# Altium PCB HANDS_FREE_MotorDrive_V2.PcbDoc
Units mil, origin at the board's own origin, x right, y up, seen from the top; angles counter-clockwise.
Board outline 1400 x 1900 mil, 2 copper layers (Top Layer, Bottom Layer); 45 components, 30 nets, 139 pads, 89 vias.
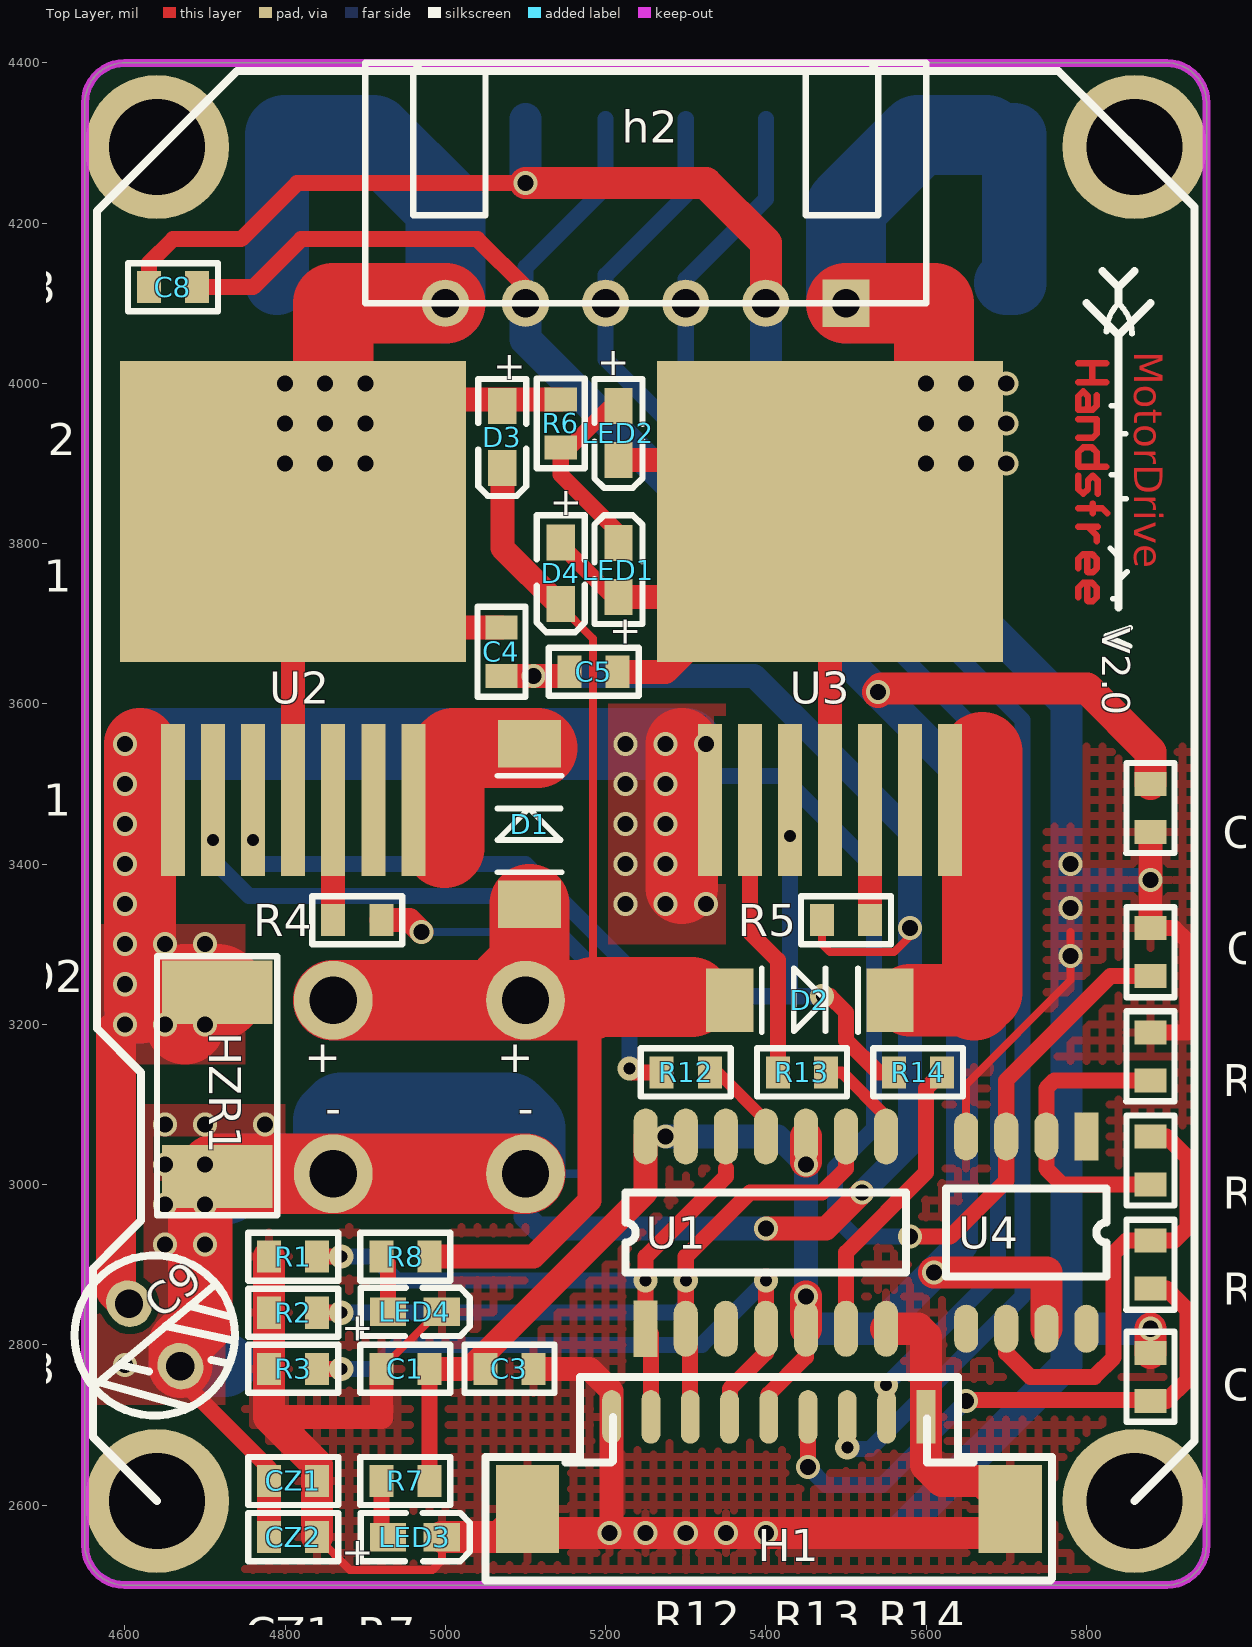
[diagram p0: Top Layer view]
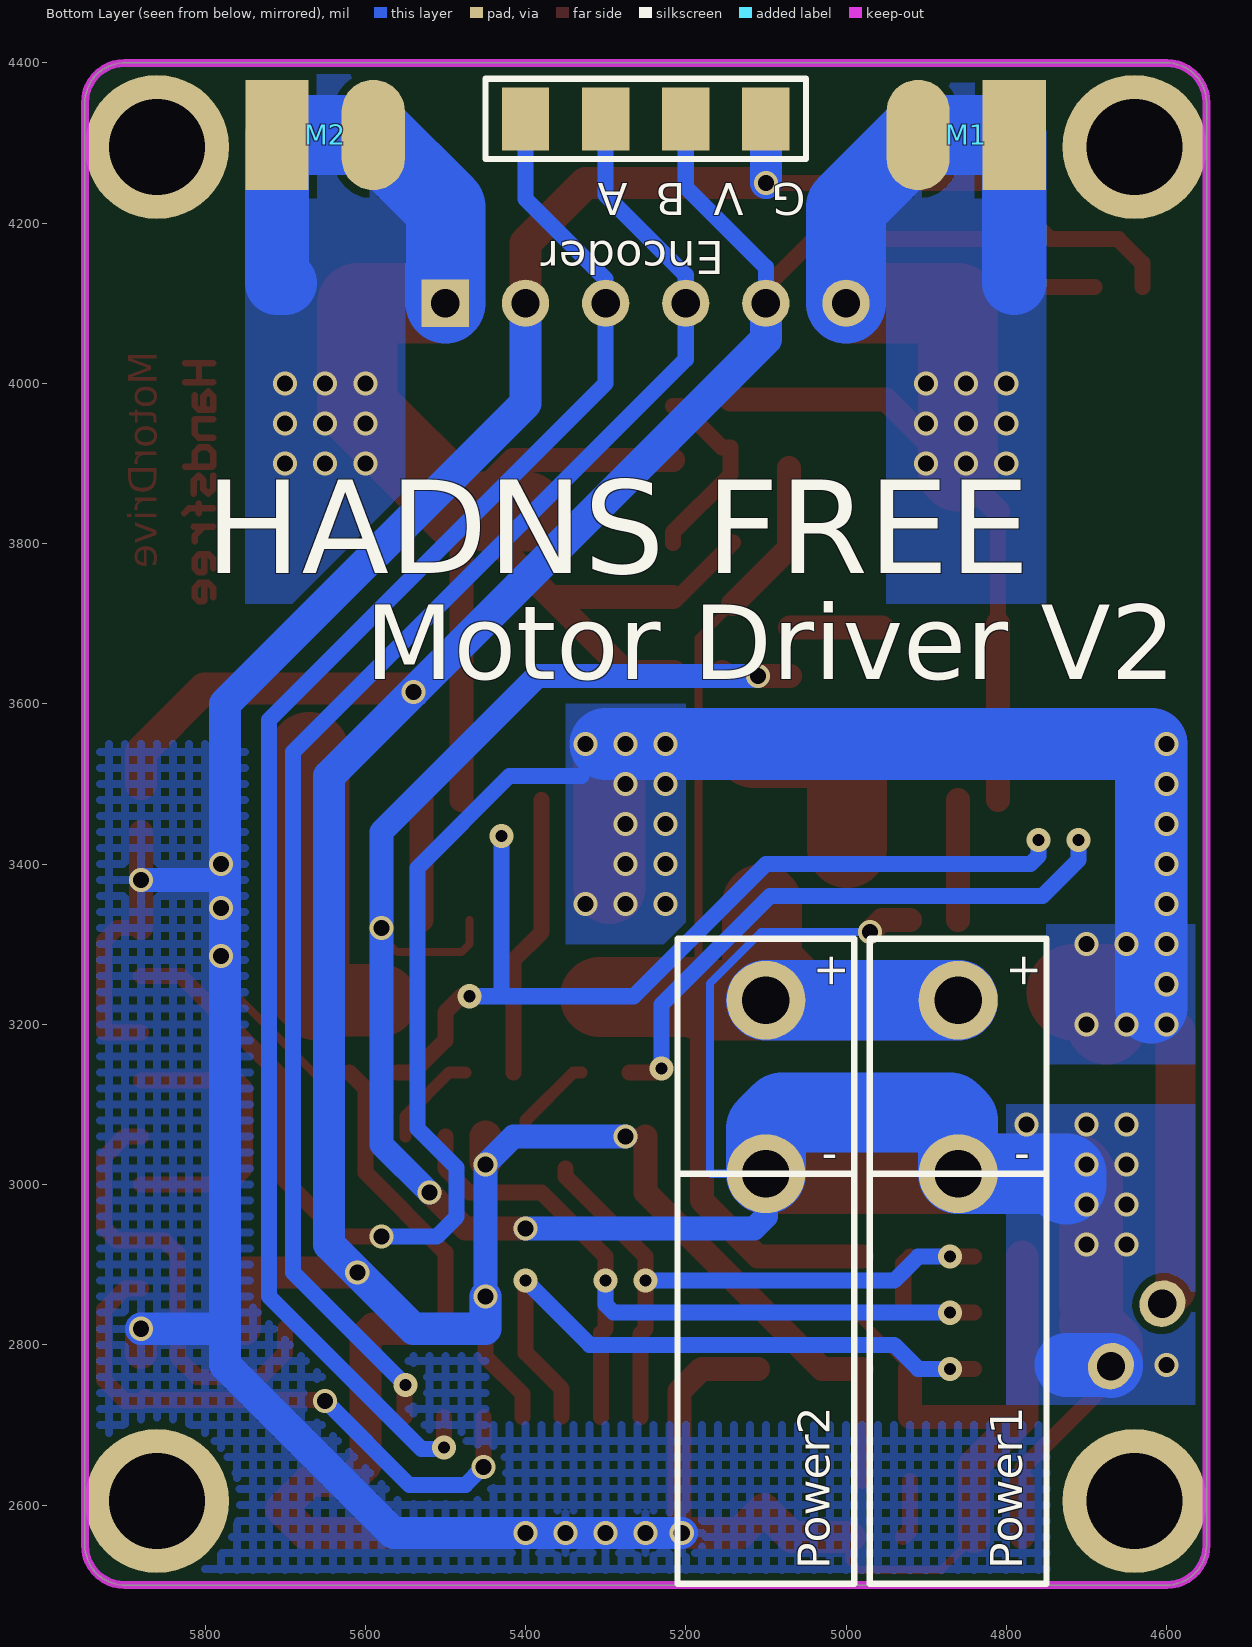
[diagram p1: Bottom Layer view, seen from below]

## Layer stack, top to bottom
Top Layer: signal copper 1.4
Dielectric: dielectric 12.6, FR-4, Dk 4.8
Bottom Layer: signal copper 1.4

## Board outline
4550,2550 4550,4350 cw(c4600,4350) 4600,4400 5900,4400 cw(c5900,4350) 5950,4350 5950,2550 cw(c5900,2550) 5900,2500 4600,2500 cw(c4600,2550)

## Design rules (kind name [scope] priority, off if disabled: settings)
Clearance [All] p1: gap=9
ComponentClearance [All] p1 off: gap=10 collisioncheckmode=3 verticalgap=10 showdistances=FALSE
Height [All] p1 off: minheight=0 maxheight=1000 prefheight=500
HoleSize [All] p1: absolutevalues=TRUE maxlimit=200 minlimit=1 maxpercent=80.000 minpercent=20.000
HoleToHoleClearance [All] p1: gap=6 allowstackedmicrovias=TRUE
MinimumSolderMaskSliver [All] p1: minsoldermaskwidth=0
PolygonConnect [All] p1: connectstyle=Relief reliefconductorwidth=10 reliefentries=4 polygonreliefangle="90 Angle"
RoutingVias [All] p1: holewidth=28 width=50 viastyle="Through Hole" minholewidth=10 minwidth=20 maxholewidth=50 maxwidth=50
SilkToSilkClearance [All] p1: silktosilkclearance=0
SilkscreenOverComponentPads SilkToSolderMaskClearance [IsPad] p1: minsilkscreentomaskgap=0
SolderMaskExpansion [All] p1: expansion=4
Width [All] p1: maxlimit=200 minlimit=7 preferedwidth=7
21 further rules are at their usual default settings.

## Components (designator, comment, footprint, x,y, rotation, side; value= is the part's Value field where it differs from the comment)
C1 "10uf" ELE_0603_P 4950,2770 r180 top
C2 "10uf" ELE_0603_P 5880,3470 r270 top
C3 "10uf" ELE_0603_P 5080,2770 r0 top
C4 "20nf" ELE_0603_P 5070,3665 r270 top
C5 "20nf" ELE_0603_P 5185,3640 r0 top
C6 "1uf" ELE_0603_P 5880,2760 r90 top
C7 "20nf" ELE_0603_P 5880,3290 r90 top
C8 "10uf" ELE_0603_P 4660,4120 r180 top
C9 "47uf" ELE_CAP_DV_5*X 4605,2850 r310 top
CZ1 "0R" ELE_0603_P 4810,2630 r0 top
CZ2 "0R" ELE_0603_P 4810,2560 r0 top
D1 "SS54" ELE_D1206 5205,3350 r90 top
D2 "SS54" ELE_D1206 5355,3130 r0 top
D3 "1N5819" ELE_SOD-323 5070,3970 r270 top
D4 "1N5819" ELE_SOD-323 5143,3800 r270 top
"G  V  B  A" "HDR_Header_1*4" HDR_Header_2.54_PH_1*4 5100,4330 r0 bottom (schematic designator "ENCORD GVBA")
H1 "Motor Io header" HDR_Molex_PH_1.25_9P 5600,2710 r180 top
h2 "HANDS_FREE_MOTOR_XH2.54_6P" HDR_Header_XH2.54_DH_1*6 5500,4100 r180 top
HZR1 "0.05R" ELE_2512_P 4715,3245 r270 top
LED1 "ELE_LED" ELE_0603极性_P 5212,3745 r90 top
LED2 "ELE_LED" ELE_0603极性_P 5220,3960 r270 top
LED3 "ELE_LED" ELE_0603极性_P 4940,2563.98 r0 top
LED4 "ELE_LED" ELE_0603极性_P 4940,2845 r0 top
M1 "HDR_Header_1*2" HDR_H_PH_2P 4790,4310 r270 bottom
M2 "HDR_Header_1*2" HDR_H_PH_2P 5710,4310 r90 bottom
Power1 "HDR_Header_Power_2P" HDR_MOLEX_POWER5557_DH_2P 4860,3230 r270 bottom
Power2 "HDR_Header_Power_2P" HDR_MOLEX_POWER5557_DH_2P 5100,3230 r270 bottom
R1 "10k" ELE_0603_P 4810,2910 r180 top
R2 "10k" ELE_0603_P 4810,2840 r180 top
R3 "10k" ELE_0603_P 4810,2770 r180 top
R4 "4.7k" ELE_0603_P 4890,3330 r180 top
R5 "4.7k" ELE_0603_P 5500,3330 r0 top
R6 "10k" ELE_0603_P 5143.98,3950 r90 top
R7 "10k" ELE_0603_P 4950,2630 r0 top
R8 "10k" ELE_0603_P 4950,2910 r0 top
R9 "1k" ELE_0603_P 5880,3160 r270 top
R10 "6.8k" ELE_0603_P 5880,3030 r90 top
R11 "1k" ELE_0603_P 5880,2900 r270 top
R12 "39R" ELE_0603_P 5300,3140 r180 top
R13 "39R" ELE_0603_P 5445,3140 r180 top
R14 "39R" ELE_0603_P 5590,3140 r0 top
U1 "CHP_74HC08D" CHP_SOP_14P 5250,2820 r90 top
U2 "CHP_BTS7970" CHP_BTS7970_P-TO-263_7#1 4660,3480 r0 top
U3 "CHP_BTS7970" CHP_BTS7970_P-TO-263_7#2 5330,3480 r0 top
U4 "CHP_OP07" CHP_SOP_8P 5800,3060 r270 top

## Footprints (in the part's own frame and the unit in brackets; to place one, negate y for a bottom-side part, rotate by r counter-clockwise, add the part's x,y. Pads: shape width x height; smd on the part's side, far side on the other; paste and mask are expansions set on the pad)
CHP_BTS7970_P-TO-263_7#1 [mil]
  rect 30x190 smd: 1(0,0) 2(50,0) 3(100,0) 4(150,0) 5(200,0) 6(250,0) 7(300,0)
  rect 432x376 smd: 8(150,360)
  Top Layer lines w40: -20,-80 -20,0 -20,51 -20,55 -20,69 -20,70 -20,80
CHP_BTS7970_P-TO-263_7#2 [mil]
  rect 30x190 smd: 1(0,0) 2(50,0) 3(100,0) 4(150,0) 5(200,0) 6(250,0) 7(300,0)
  rect 432x376 smd: 8(150,360)
CHP_SOP_8P [mil]
  rect 60x30 smd: 1(0,0)
  oval 60x30 smd: 2(0,-50) 3(0,-100) 4(0,-150) 5(240,-150) 6(240,-100) 7(240,-50) 8(240,0)
  silkscreen extent 65,-175 175,25
CHP_SOP_14P [mil]
  rect 70x30 smd: 1(0,0)
  oval 70x30 smd: 2(0,-50) 3(0,-100) 4(0,-150) 5(0,-200) 6(0,-250) 7(0,-300) 8(240,-300) 9(240,-250) 10(240,-200) 11(240,-150) 12(240,-100) 13(240,-50) 14(240,0)
  silkscreen extent 70,-325 170,25
ELE_0603_P [mil]
  rect 30x40 smd: 1(-30,0) 2(30,0)
  silkscreen extent -56,-30 56,30
ELE_0603极性_P [mil]
  rect 45x35.43 smd: 1(-11.46,-4) 2(55.46,-4)
  silkscreen extent -45,-34 91,26
ELE_2512_P [mm]
  rect 2x3.5 smd: 1(0.127,0) 2(5.969,0)
  silkscreen extent -1.02,-1.91 7.2,1.91
ELE_CAP_DV_5*X [mil]
  oval 59x55 hole 35.4: 1(-1,1) 2(100,0)
  silkscreen extent -50,-100 150,100
ELE_D1206 [mm]
  rect 1.5x2 smd: 1(0,2.54) 2(5.08,2.54)
  silkscreen extent 1.02,1.52 4.06,3.56
ELE_SOD-323 [mil]
  rect 45x35.43 smd: 1(-1.46,1) 2(75.46,1)
  silkscreen extent -35,-29 111,31
HDR_H_PH_2P [mm]
  rect 3.5x2 smd: 1(0,0)
  oval 3.5x2 smd: 2(0,-3.048)
HDR_Header_2.54_PH_1*4 [mm] "Connector; Header; 4 Position"
  rect 1.5x2 smd: 1(0,0) 2(2.54,0) 3(5.08,0) 4(7.62,0)
  silkscreen extent -1.27,-1.27 8.89,1.27
HDR_Header_XH2.54_DH_1*6 [mm] "Connector; Header; 2 Position; Right"
  rect 1.5x1.5 hole 0.9: 1(0,0)
  round 1.5 hole 0.9: 2(2.54,0) 3(5.08,0) 4(7.62,0) 5(10.16,0) 6(12.7,0)
  silkscreen extent -2.54,-7.62 15.24,0
HDR_Molex_PH_1.25_9P [mm]
  rect 0.6x1.7 smd: 1(0,0)
  oval 0.6x1.7 smd: 2(1.25,0) 3(2.5,0) 4(3.745,0) 5(4.989,0) 6(6.234,0) 7(7.478,0) 8(8.723,0) 9(9.968,0)
  rect 2x2.8 smd: 10(-2.667,2.921) 11(12.635,2.921)
  silkscreen extent -3.99,-1.27 13.97,5.18
HDR_MOLEX_POWER5557_DH_2P [mm]
  round 2.5 hole 1.5: 1(0,0) 2(5.5,0)
  silkscreen extent -1.95,-2.8 18.5,2.8

## Part data
C1 C2 C3 C4 C5 C6 C7 C8: library part ELE_Cap, "电?"
C9: library part ELE_Cap_Pole, "ÌùÆ¬ ¼«Ð"
CZ1 CZ2 R1 R2 R3 R4 R5 R6 R7 R8 R9 R10 R11 R12 R13 R14: library part ELE_RES, "贴片"
D1 D2: library part ELE_Diode, "贴片 二"
D3 D4: library part ELE_Standard_Diode_SOD323, "ÌùÆ¬ ¶þ¼«¹"
H1: library part HANDS_FREE_MOTOR, "ÎÔÌù molex 1.25¼ä¾"
h2: "直插 XH2.54 卧贴 6P"
HZR1: library part ELE_RES_HZR, "2512ºÏ½ðµ"
LED1 LED2 LED3 LED4: "发光"
U1: "贴片 CHP_74HC08D芯片 S"
U4: "贴片 OP07芯片"

## Free pads (board coordinates)
  round 180 hole 120: 0(4640,2605) 0(4640,4295) 0(5860,2605) 0(5860,4295)

## Via types
v1: diameter 30, hole 20, Top Layer to Bottom Layer, 76 vias
v2: diameter 30, hole 15, Top Layer to Bottom Layer, 13 vias

## Nets (pads, with @x,y where several pads share a name; then routed paths per layer and width w, separated by ;. In a path a pad name is that pad's centre, name@x,y a point inside that pad or via, vN(x,y) a via of type N, cw(c..) or ccw(c..) an arc to the next point about the centre after c; other vN are vias at no path point)
ENCORD_A: "G  V  B  A.4" H1.3 h2.3 | length 2020.9
  Top Layer w20: v2(5501.57,2671.57) H1.3
  Bottom Layer w20: 5400,4330 5400,4230 5300,4130 h2.3 5300,4000 5720,3580 5720,2860 5530,2670 v2@5501.57,2670
ENCORD_B: "G  V  B  A.3" H1.2 h2.4 | length 1922.7
  Top Layer w20: v2(5550,2750) 5550.79,2749.21 H1.2
  Bottom Layer w20: 5300,4330 5300,4235 5200,4135 h2.4 5200,4030 5690,3540 5690,2890 v2(5550,2750)
GND: C4.2 C5.1 C9.2 CZ1.1 CZ2.1 HZR1.2 Power1.2 Power2.2 R4.1 R5.1 | length 3797.5
  Top Layer w10: R5.1 5470,3300 5480,3290 5560,3290 5580,3310 v1(5580,3320)
  Top Layer w20: C9.2@4663.5,2762.5 4780,2646 CZ1.1
  Top Layer w30: CZ2.1 CZ1.1 ; R4.1 4955,3330 v1(4970,3315) ; C4.2 v1(5110,3635) 5150,3635 C5.1 ; v1(5400,2945) 5475,2945 v1(5520,2990)
  Top Layer w80: C9.2 4669.28,2801.52 4694,2826.24 ; 4694,2850 HZR1.2@4694,3001.06
  Top Layer w100: HZR1.2 4715,3013.46 Power1.2 Power2.2
  Bottom Layer w10: v1(4970,3315) 5106.06,3315 5170,3251.06 5170,3015 5168.46,3013.46 Power2.2
  Bottom Layer w30: Power2.2 5100,2960 5115,2945 v1(5400,2945) ; v1(5110,3635) 5385,3635 5580,3440 v1(5580,3320) 5580,3050 v1(5520,2990)
  Bottom Layer w80: C9.2 4669.28,2775 4725,2775
  Bottom Layer w100: 4725,3000 4725,3013.46 Power1.2 4860,3080 4870,3090 5080,3090 5100,3070 Power2.2
  other v1: 4600,2775 4650,2925 4700,2925 4650,2975 4700,2975 4650,3025 4700,3025 4650,3075 4700,3075 4775,3075
GND_L: "G  V  B  A.1" C1.2 C2.2 C3.2 C6.2 C7.2 C8.2 CZ1.2 CZ2.2 H1.1 H1.9 H1.10 H1.11 h2.2 LED3.2 LED4.2 R1.2 R2.2 R3.2 R9.1 U1.7 U4.4 | length 6307.4
  Top Layer w10: CZ2.2 4881,2519 4984,2519 4995.46,2530.46 LED3.2 ; C1.2 4991,2841 LED4.2 ; U4.4 5650,3125 5780,3255 5780,3315
  Top Layer w20: C8.2 4630,4150 4660,4180 4745,4180 4815,4250 v1(5100,4250) ; R9.1 5926,3189.99 5926,3304 5910,3320 C7.2
  Top Layer w30: 4780,2710 4920,2710 C1.2 ; C3.2 5180,2770 5207.57,2742.43 H1.9 v1@5207.57,2567.57 ; C7.2 v1(5880,3380) C2.2
  Top Layer w40: R1.2 R2.2 R3.2 4780,2710 4840,2650 CZ1.2 CZ2.2 ; LED3.2 5067.56,2559.98 H1.11 5132.57,2565 v1(5205,2565) v1(5250,2565) v1(5300,2565) v1(5350,2565) v1(5400,2565) 5675,2565 H1.10 5670,2630 5620,2630 5600,2650 H1.1 5600,2810 5590,2820 U1.7 ; v1(5100,4250) 5325,4250 5400,4175 h2.2 ; C6.2 v1(5880,2820)
  Bottom Layer w30: 5775,3380 v1(5880,3380)
  Bottom Layer w40: v1(5100,4250) 5100,4330 ; v1(5205,2565) v1(5250,2565) v1(5300,2565) v1(5350,2565) v1(5400,2565) 5565,2565 5775,2775 5775,2820 ; h2.2 5400,3975 5775,3600 5775,3380 5775,2820 ; v1(5880,2820) 5775,2820
  other v1: 5780,3285 5780,3345.41 5780,3400
IO_EN: H1.6 R3.1 U1.4 | length 793.8
  Top Layer w20: R3.1 v2(4870,2770) ; H1.6@5355,2710.43 5355,2745 5400,2790 U1.4 v2(5400,2880)
  Bottom Layer w20: v2(4870,2770) 4910,2770 4940,2800 5320,2800 v2(5400,2880)
IO_EN_CHIP: R14.1 U2.3 U3.3 | length 1152.3
  Top Layer w20: v2(5470,3235) 5480,3235 5500,3215 5500,3180 5540,3140 R14.1
  Bottom Layer w20: v2(4760,3430) 4760,3410 4770,3400 5100,3400 5265,3235 5430,3235 ; v2(5430,3435) 5430,3235 ; v2(5470,3235) 5430,3235
IS_1: U2.6
IS_2: U3.6
L_IN1: R12.1 U1.11 | length 114.9
  Top Layer w15: R12.1 5340,3140 5400,3080 U1.11
L_IN2: R13.1 U1.8 | length 122.8
  Top Layer w15: R13.1 5495,3140 5550,3085 U1.8
MOTORIS: C6.1 H1.4 R11.2 | length 741.5
  Top Layer w20: v1(5452.5,2647.5) 5452.57,2647.57 H1.4 ; v1(5650,2730) 5651,2731 5871,2731 C6.1@5875,2735 ; C6.1 5900,2730 5926,2756 5926,2844 5900,2870 R11.2
  Bottom Layer w20: v1(5452.5,2647.5) 5475,2625 5545,2625 v1(5650,2730)
MP1: C4.1 D3.1 h2.6 M1.1 M1.2 R6.2 U2.4 U2.8 | length 1759.2
  Top Layer w20: U2.8@4810,3700 U2.8
  Top Layer w30: U2.4 U2.8@4810,3700 ; U2.8 4860,3890 4950,3980 R6.2 ; U2.8@4955,3695 C4.1
  Top Layer w100: U2.8@4860,3890 4860,4100 h2.6
  Bottom Layer w80: 4790,4125 M1.1
  Bottom Layer w100: M1.1@4800,4310 M1.2 5000,4220 h2.6
  other v1: 4800,3900 4850,3900 4900,3900 4800,3950 4850,3950 4900,3950 4800,4000 4850,4000 4900,4000
MP2: C5.2 D4.1 h2.1 LED1.1 LED2.2 M2.1 M2.2 U3.4 U3.8 | length 2260.4
  Top Layer w20: D4.1@5141,3801.46 5208.93,3733.54 LED1.1 ; 5275,3640 5280,3640
  Top Layer w30: C5.2 5275,3640 U3.8@5368.54,3733.54 ; LED1.1 U3.8@5368.54,3733.54 ; LED2.2 5415.46,3904.54 U3.8 ; U3.4 U3.8 ; U3.8@5368.54,3733.54 5475,3840 U3.8
  Top Layer w100: U3.8@5400,3840 U3.8@5450,3840 ; U3.8 5610,3970 5610,4100 h2.1
  Bottom Layer w80: 5700,4125 5710,4125 M2.1
  Bottom Layer w100: h2.1 5500,4220 M2.2 M2.1@5675,4310
  other v1: 5600,3900 5650,3900 5700,3900 5600,3950 5650,3950 5700,3950 5600,4000 5650,4000 5700,4000
NetC7_1: C7.1 C9.1 HZR1.1 U2.1 U3.1 U4.3 | length 3307.8
  Top Layer w20: v1(5580,2935) 5630,2935 5700,3005 U4.3 5700,3130 5830,3260 C7.1
  Top Layer w50: C9.1 4589,2867.53 4589,3191 4619,3221
  Top Layer w90: 4619,3221 4619,3550 ; 5295,3370 5295,3550
  Top Layer w100: 4675,3200 HZR1.1@4675,3240
  Top Layer w120: HZR1.1@4675,3240 HZR1.1
  Bottom Layer w20: 5330,3510 5420,3510 5535,3395 5535,3070 5486,3021 5486,2960 5511,2935 v1(5580,2935)
  Bottom Layer w90: 4619,3221 4619,3550 v1(5225,3550) v1(5275,3550) 5300,3550
  other v1: 4600,3200 4650,3200 4700,3200 4600,3250 4600,3300 4650,3300 4700,3300 4600,3350 5225,3350 5275,3350 5325,3350 4600,3400 5225,3400 5275,3400 4600,3450 5225,3450 5275,3450 4600,3500 5225,3500 5275,3500 4600,3550 5325,3550
NetD1_2: D1.2 U2.7 | length 234.6
  Top Layer w100: 4998.83,3420 4998.83,3533.83 5010,3545 D1.2@5115,3545
NetD2_2: D2.2 U3.7 | length 394.1
  Top Layer w90: D2.2@5580,3230 5660,3230
  Top Layer w100: 5660,3230 5670,3240 5670,3540
NetLED1_2: LED1.2 LED2.1 R6.1 | length 242.7
  Top Layer w20: LED1.2 5216,3814 5143.98,3886.02 R6.1 5155,3920 5206.46,3971.46 LED2.1
NetLED3_1: LED3.1 R7.1 | length 73.6
  Top Layer w20: R7.1 4920,2568.52 LED3.1
NetLED4_1: LED4.1 R8.1 | length 72.5
  Top Layer w20: R8.1 4928.54,2901.47 LED4.1
NetR4_2: R4.2 U2.5 | length 150
  Top Layer w30: R4.2 U2.5
NetR5_2: R5.2 U3.5 | length 150
  Top Layer w30: R5.2 U3.5
NetR9_2: R9.2 R10.1 U4.2 | length 372.4
  Top Layer w20: R10.1 5770,3000 5750,3020 U4.2 5750,3120 5760,3130 R9.2
NetR10_2: R10.2 R11.1 U4.6 | length 566.4
  Top Layer w20: U4.6 5700,2790 5730,2760 5810,2760 5834,2784 5834,2914 5850,2930 R11.1 5910,2930 5926,2946 5926,3034 5900,3060 R10.2
NetR12_2: R12.2 U2.2 | length 734.6
  Top Layer w20: v2@5235,3140 R12.2
  Bottom Layer w20: v2(4710,3430) 4710,3405 4755,3360 5095,3360 5230,3225 v2(5230,3145)
NetR13_2: R13.2 U3.2 | length 354.5
  Top Layer w20: U3.2 5380,3315 5415,3280 R13.2
NetR14_2: R14.2 U1.6 | length 369.7
  Top Layer w20: U1.6 5500,2915.15 5600,3015.15 5600,3120 R14.2
PWM_A: H1.8 R1.1 U1.1 U1.12 | length 776.6
  Top Layer w20: R1.1 v2(4870,2910) ; H1.8 5256.57,2813.43 U1.1 v2(5250,2880) 5250,2910 5350,3010 5350,3020
  Bottom Layer w20: v2(4870,2910) 4910,2910 4940,2880 v2(5250,2880)
PWM_B: H1.7 R2.1 U1.2 U1.9 | length 972
  Top Layer w20: R2.1 v2(4870,2840) ; v2@5300,2870 U1.2 5305.57,2814.43 H1.7 ; v2(5300,2880) 5300,2910 5380,2990 5470,2990 5500,3020 U1.9
  Bottom Layer w20: v2(4870,2840) 5290,2840 5300,2850 v2(5300,2880)
VC5: "G  V  B  A.2" C1.1 C2.1 C3.1 C8.1 H1.5 h2.5 R7.2 U1.5 U1.10 U1.13 U1.14 U4.7 | length 4230.6
  Top Layer w20: C8.1 4760,4120 4820,4180 5040,4180 5100,4120 h2.5 ; R7.2 C1.1 ; U1.14 v1(5275,3060) U1.13 ; H1.5 5403.57,2738.57 5450,2785 U1.5
  Top Layer w30: C1.1 5030,2770 5250,2990 U1.14
  Top Layer w40: U1.5 v1(5450,2860) ; U1.10@5450,3029 U1.10 ; v1(5540,3615) 5544,3619 5801,3619 5880,3540 C2.1 ; v1(5610,2890) 5750,2890 U4.7
  Bottom Layer w20: h2.5 5100,4145 5200,4245 5200,4330
  Bottom Layer w30: v1(5275,3060) 5415,3060 v1(5450,3025) v1(5450,2860)
  Bottom Layer w40: h2.5 5100,4055 v1(5540,3615) 5645,3510 5645,2925 5540,2820 5450,2820 v1(5450,2860)
VC_B: D1.1 D2.1 D3.2 D4.2 Power1.1 Power2.1 R8.2 | length 2008
  Top Layer w10: D4.2@5141,3724.54 5184,3681.54 5184,3234
  Top Layer w30: R8.2 5110,2910 5180,2980 5180,3230 ; D3.2 5071,3794.54 D4.2@5141,3724.54
  Top Layer w100: Power1.1 Power2.1 ; D1.1 5105,3275 5080,3250 Power2.1 ; 5180,3230 Power2.1 ; 5184,3234 5307,3234
  Bottom Layer w100: Power1.1 Power2.1
pads on no net: U1.3 U4.1 U4.5 U4.8
copper on no net: | length 700.1
  Top Layer w8: 5790,3733 5790,3745 5796,3751 5807,3751 5813,3745 5813,3733 5808,3728 5802,3728 5801,3729 5801,3751 ; 5790,3769 5790,3781 5796,3787 5807,3787 5813,3781 5813,3769 5808,3764 5802,3764 5801,3765 5801,3787 ; 5790,3821 5814,3821 ; 5790,3844 5820,3844 5826,3838 ; 5790,3885 5790,3868 5796,3862 5802,3868 5802,3879 5808,3885 5814,3879 5814,3862 ; 5790,3932 5808,3932 5813,3937 5813,3955 5790,3955 ; 5790,4001.5 5825,4001.5 ; 5790,4025 5825,4025 ; 5799,3967 5802,3970 5802,3984 5796,3990 5790,3984 5790,3967 5808,3967 5813,3972 5813,3985 ; 5802,3821 5813,3810 5813,3803 ; 5807.5,4001.5 5807.5,4025 ; 5808,3838 5808,3850 ; 5813,3897 5813,3914 5807,3920 5796,3920 5790,3914 5790,3897 5791,3896 5825,3896

## Polygon pours and split planes (outlines as drawn)
GND_L on Top Layer "Top Overlay-No Net" (hatched 90Degree grid 20 track 10, remove dead copper, pour order 16): 4750,2946.89 4750,2446.89 5050,2446.89 6000,2446.89 6000,2546.89 6000,3546.89 5850,3546.89 5800,3546.89 5800,3446.89 5750,3446.89 5750,3546.89 5750,3146.89 5700,3146.89 5250,3146.89 5250,2946.89
GND on Top Layer "Top Overlay-No Net" (solid, remove dead copper, pour order 15): 4475,3100 4800,3100 4800,3013.46 4800,2975 4700,2975 4700,2925 4700,2850 4725,2850 4725,2725 4475,2725
NetC7_1 on Top Layer "Top Overlay-No Net" (solid, remove dead copper, pour order 14): 4525,3325 4525,3150 4750,3150 4750,3325
NetC7_1 on Top Layer "Top Overlay-No Net" (solid, remove dead copper, pour order 11): 5200,3600 5350,3600 5350,3300 5200,3300
MP2 on Bottom Layer "Top Overlay-No Net" (solid, remove dead copper, pour order 20): 5750,4425 5550,4425 5550,3725 5750,3725
MP1 on Bottom Layer "Top Overlay-No Net" (solid, remove dead copper, pour order 19): 4750,4375 4750,3725 4925,3725 4950,3725 4950,4375
GND on Bottom Layer "Top Overlay-No Net" (solid, remove dead copper, pour order 17): 4625,3100 4800,3100 4800,2975 4800,2725 4500,2725 4525,2725 4525,3100
NetC7_1 on Bottom Layer "Top Overlay-No Net" (solid, remove dead copper, pour order 13): 4500,3150 4500,3325 4750,3325 4750,3150
GND_L on Bottom Layer "Top Overlay-No Net" (hatched 90Degree grid 20 track 10, remove dead copper, pour order 18): 4750,2450 4750,2700 4800,2700 5450,2700 5450,2900 5460,2900 5580,3020 5750,3190 5750,3550 6000,3550 6000,2450
NetC7_1 on Bottom Layer "Top Overlay-No Net" (solid, remove dead copper, pour order 12): 5200,3600 5350,3600 5350,3335 5350,3300 5340,3300 5200,3300 5200,3320

## Keep-outs
Keep-Out Layer:
  lines w10: 4550,2550 ccw(c4600,2550) 4600,2500 5900,2500 ccw(c5900,2550) 5950,2550 5950,4350 ccw(c5900,4350) 5900,4400 4600,4400 ccw(c4600,4350) 4550,4350 4550,2900 4550,2550

## Other copper
Top Layer:
  text "MotorDrive" at 5860,4040 h35.43 r270

## Silkscreen, mask and mechanical layers (free items; w line width, h text height)
Top Overlay:
  lines w7: 5825.15,4064.15 cw(c5875.85,4064.15) 5840,4100 5842.15,4097.85 cw(c5806.3,4062) 5857,4062 ; 5830,3794 5837,3787 5840,3787 ; 5831,3679 5854,3672 5825,3685 5855,3695 ; 5831,3886 5840,3886 ; 5831,3972 5838,3972 ; 5833,3731 5838,3731 ; 5840,3756 5842,3756 5851,3765 ; 5840,3937 5849,3937 ; 5841,3856 5850,3856
  lines w10: 4620,2985 4620,2955 ; 4640,2605 4560,2685 4560,2895 4595,2930 4620,2955 ; 5800,4100 5840,4060 ; 5820,4140 5840,4120 ; 5840,3720 5840,4040 5840,4060 ; 5840,4100 5840,4120 ; 5860,2605 5935,2680 5935,4220 5765,4390 4900,4390 4740,4390 4640,4290 4565,4215 4565,3195 4620,3140 4620,2955 ; 5860,4140 5840,4120 ; 5880,4100 5840,4060
  text "+" at 5230,4040 h35.43 r180
  text "+" at 5060,4005 h35.43
  text "+" at 5130,3835.46 h35.43
  text "+" at 5245,3705 h35.43 r180
  text "V2.0" at 5820,3695 h35 r270
  text "+" at 4870,2805 h35.43
  text "+" at 4870,2525 h35.43
Bottom Overlay:
  text "Encoder" at 5152,4191 h70 r180
  text "HADNS FREE" at 5800,3725 h200
  text "Motor Driver V2" at 5600,3600 h160
Top Solder:
  lines w8: 5790,3733 5790,3745 5796,3751 5807,3751 5813,3745 5813,3733 5808,3728 5802,3728 5801,3729 5801,3751 ; 5790,3769 5790,3781 5796,3787 5807,3787 5813,3781 5813,3769 5808,3764 5802,3764 5801,3765 5801,3787 ; 5790,3821 5814,3821 ; 5790,3844 5820,3844 5826,3838 ; 5790,3885 5790,3868 5796,3862 5802,3868 5802,3879 5808,3885 5814,3879 5814,3862 ; 5790,3932 5808,3932 5813,3937 5813,3955 5790,3955 ; 5790,4001.5 5825,4001.5 ; 5790,4025 5825,4025 ; 5799,3967 5802,3970 5802,3984 5796,3990 5790,3984 5790,3967 5808,3967 5813,3972 5813,3985 ; 5802,3821 5813,3810 5813,3803 ; 5807.5,4001.5 5807.5,4025 ; 5808,3838 5808,3850 ; 5813,3897 5813,3914 5807,3920 5796,3920 5790,3914 5790,3897 5791,3896 5825,3896
  lines w60: 5000,3410 5000,3550 ; 5670,3410 5670,3550
  lines w70: 4615,3550 4615,3255 4635,3235 4705,3235 ; 4630,3285 4700,3285
  lines w80: 4763.46,3013.46 4860,3013.46
  text "MotorDrive" at 5860,4040 h35.43 r270
Bottom Solder:
  rectangle: 5555,3870 5745,4030
  rectangle: 4755,3870 4945,4030
  rectangle: 5210,3335 5340,3585
  rectangle: 4580,2900 4730,3100
  rectangle: 4580,3165 4725,3320
  lines w70: 4615,3205 4615,3550 5275,3550 5275,3350 ; 4790,3970 4790,4275 ; 4860,3013.46 4860,3075 4880,3095 5080,3095 5100,3075 5100,3013.46 ; 4860,3230 5100,3230 ; 5710,3940 5710,4310
  lines w80: 4795,4310 4910,4310 ; 5595,4310 5710,4310

## Text inside footprints (layer, text, board x,y; h text height)
Power1: Top Overlay "-" at 4870,3075 h40; Top Overlay "+" at 4870,3140 h40; Bottom Overlay "-" at 4790,3020 h40; Bottom Overlay "+" at 4795,3290 h40 r90
Power2: Top Overlay "-" at 5110,3075 h40; Top Overlay "+" at 5110,3140 h40; Bottom Overlay "-" at 5030,3020 h40; Bottom Overlay "+" at 5035,3290 h40 r90